# Altium PCB Board.PcbDoc
Units mil, origin at the board's own origin, x right, y up, seen from the top; angles counter-clockwise.
Board outline 1597.6 x 1597.6 mil, 2 copper layers (Top Layer, Bottom Layer), stack 80.925 mil thick; 28 components, 22 nets, 125 pads, 17 vias.
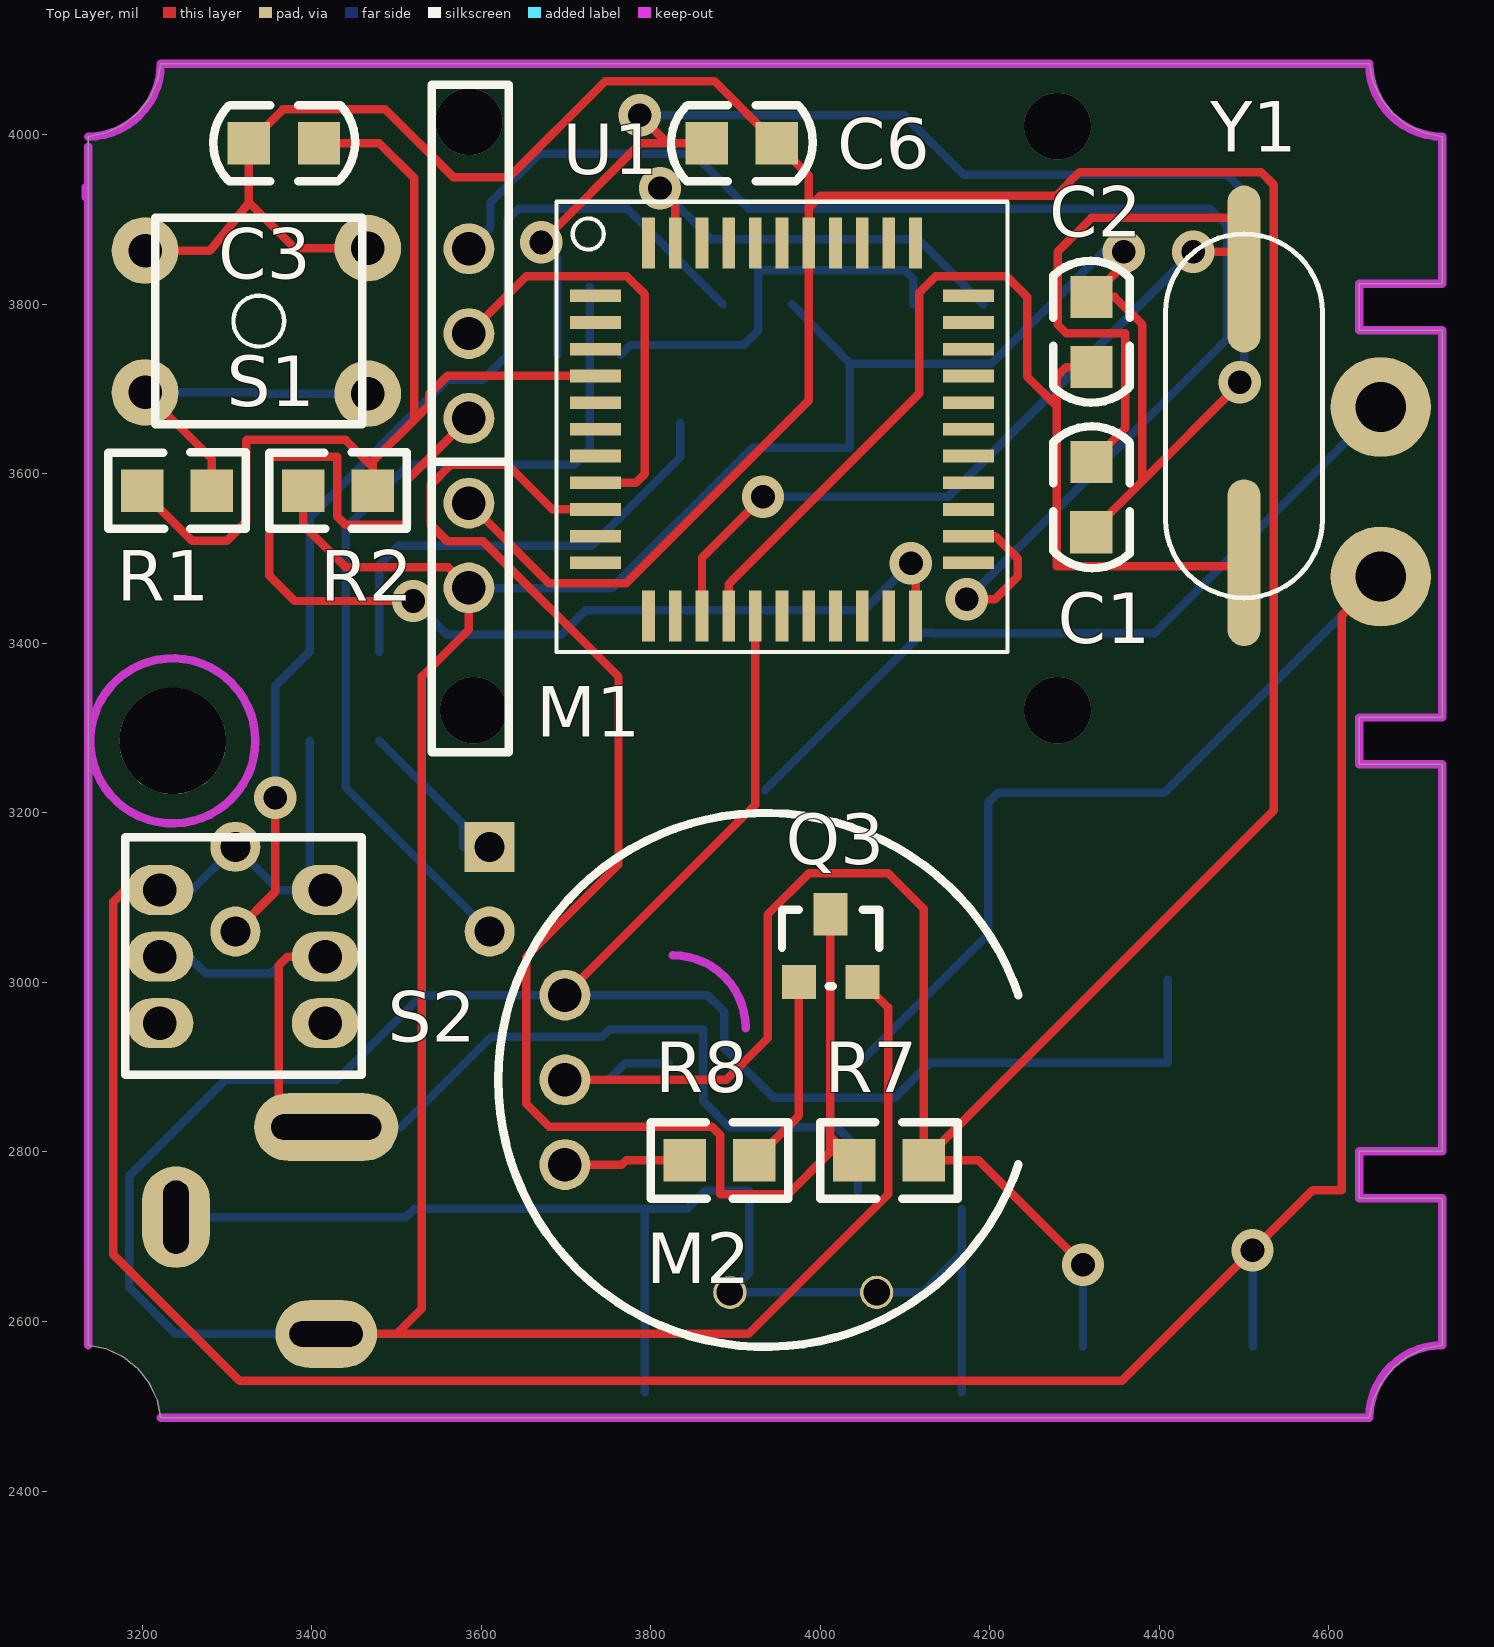
[diagram p0: Top Layer view]
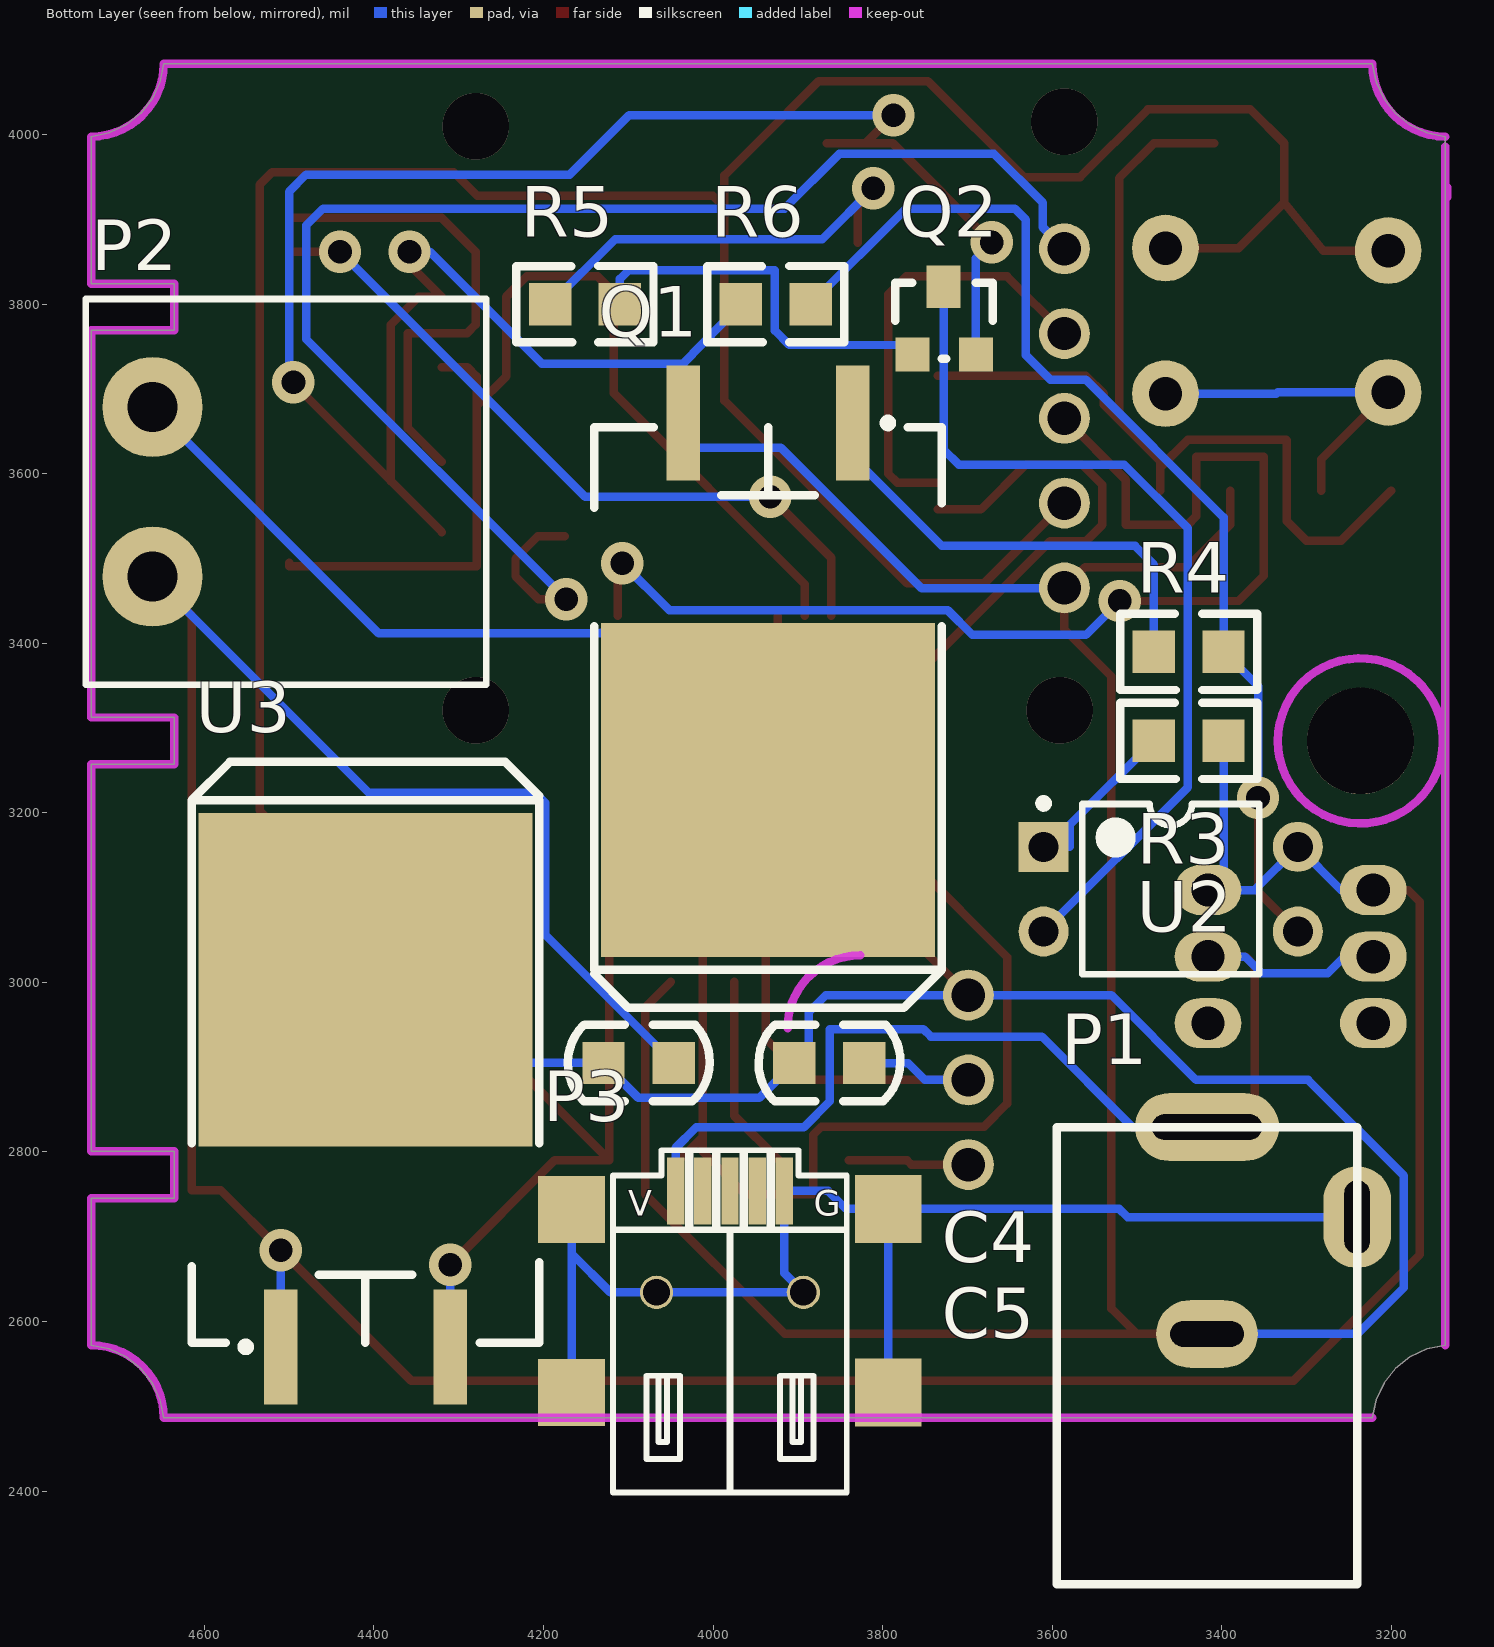
[diagram p1: Bottom Layer view, seen from below]
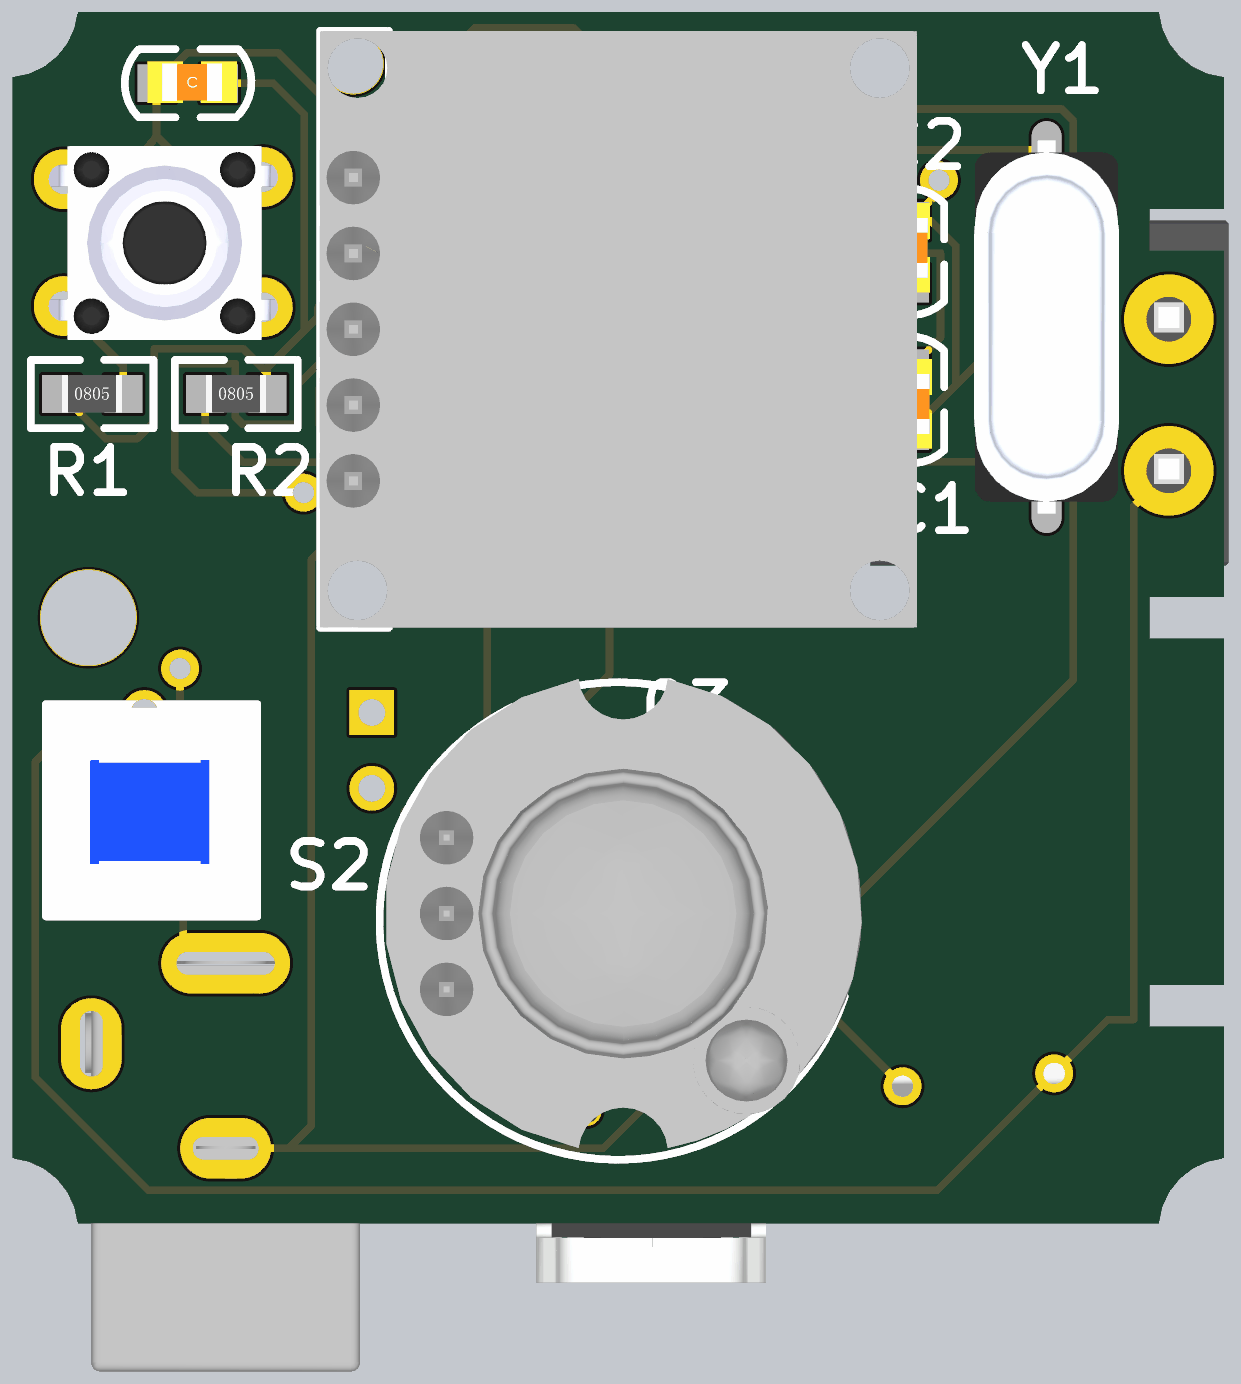
[diagram p2: 3D render of the assembled board from above, using the file's embedded part models]
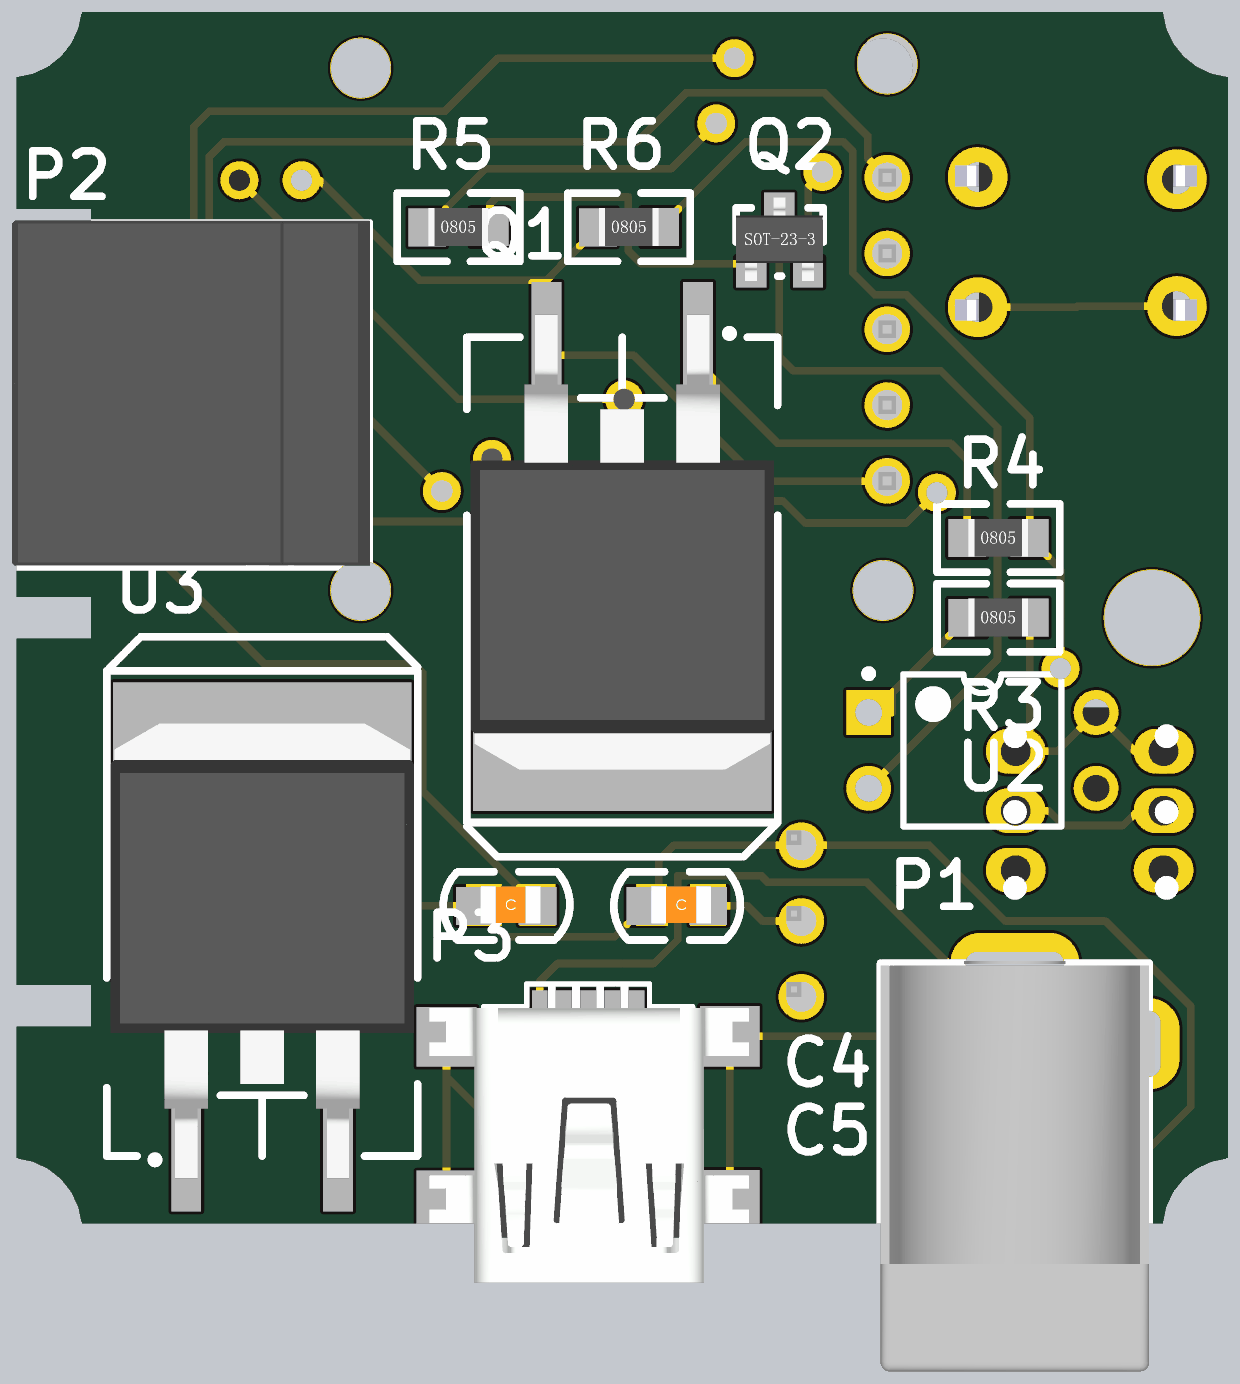
[diagram p3: 3D render of the assembled board from below, using the file's embedded part models]

## Layer stack, top to bottom
Top Solder: solder mask 0.4, Solder Resist, Dk 3.5
Top Layer: signal copper 1.4
Dielectric 1: dielectric 78.125, FR-4, Dk 4.8
Bottom Layer: signal copper 1.4
Bottom Solder: solder mask 0.4, Solder Resist, Dk 3.5

## Board outline
3136.2,3997.96 3136.2,2572.04 3157.67,2567.59 3177.53,2558.32 3194.73,2544.73 3208.32,2527.53 3217.59,2507.67 3222.04,2486.2 4647.96,2486.2 4652.41,2507.67 4661.68,2527.53 4675.27,2544.73 4692.47,2558.32 4712.33,2567.59 4733.8,2572.04 4733.8,2745.63 4635.79,2745.63 4635.79,2800.75 4733.8,2800.75 4733.8,3257.44 4635.79,3257.44 4635.79,3312.56 4733.8,3312.56 4733.8,3769.25 4635.79,3769.25 4635.79,3824.37 4733.8,3824.37 4733.8,3997.96 4712.33,4002.41 4692.47,4011.68 4675.27,4025.27 4661.68,4042.47 4652.41,4062.33 4647.96,4083.8 3222.04,4083.8 3217.59,4062.33 3208.32,4042.47 3194.73,4025.27 3177.53,4011.68 3157.67,4002.41

## Design rules (kind name [scope] priority, off if disabled: settings)
Clearance [All] p1: gap=10
PolygonConnect [All] p1: connectstyle=Relief reliefconductorwidth=10 reliefentries=4 polygonreliefangle="90 Angle" airgapwidth=10
RoomDefinition LED [InComponentClass('LED')] p1: confinementstyle=ConfineIn formatcopy=TRUE lockcomponents=FALSE outline 4080,3295 4747.44,3295 4747.44,3890 4080,3890
RoomDefinition Amplifier [InComponentClass('Amplifier')] p2: confinementstyle=ConfineIn formatcopy=TRUE lockcomponents=FALSE outline 3110,2920 4760,2920 4760,4130 3110,4130
RoomDefinition Power [InComponentClass('Power')] p3: confinementstyle=ConfineIn formatcopy=TRUE lockcomponents=FALSE outline 3160,2360 4680,2360 4680,3290 3160,3290
RoomDefinition Reset [InComponentClass('Reset')] p4: confinementstyle=ConfineIn formatcopy=TRUE lockcomponents=FALSE outline 3140,3430 3540,3430 3540,4060 3140,4060
RoomDefinition Oscillator [InComponentClass('Oscillator')] p5: confinementstyle=ConfineIn formatcopy=TRUE lockcomponents=FALSE outline 4170,3360 4830,3360 4830,4079.8 4170,4079.8
RoomDefinition Microcontroller_STC12C5A60S2 [InComponentClass('Microcontroller_STC12C5A60S2')] p6: confinementstyle=ConfineIn formatcopy=TRUE lockcomponents=FALSE outline 3680,3380 4260,3380 4260,4060 3680,4060
RoomDefinition Level_Switch [InComponentClass('Level_Switch')] p7: confinementstyle=ConfineIn formatcopy=TRUE lockcomponents=FALSE outline 3737.7,2739.8 4327.7,2739.8 4327.7,3220 3737.7,3220
RoomDefinition Human_Body_Detection [InComponentClass('Human_Body_Detection')] p8: confinementstyle=ConfineIn formatcopy=TRUE lockcomponents=FALSE outline 3600,2540 4330,2540 4330,3230 3600,3230
RoomDefinition Gesture_Recognition [InComponentClass('Gesture_Recognition')] p9: confinementstyle=ConfineIn formatcopy=TRUE lockcomponents=FALSE outline 3530.51,3260 4340.51,3260 4340.51,4170.51 3530.51,4170.51
RoutingVias [All] p1: holewidth=28 width=50 viastyle="Through Hole" minholewidth=28 minwidth=50 maxholewidth=28 maxwidth=50
SolderMaskExpansion [All] p1: expansion=4
Width [All] p1: maxlimit=10 minlimit=10 preferedwidth=10
29 further rules are at their usual default settings.

## Classes and differential pairs
component class Amplifier: Q1 Q2 R3 R4 R5 R6 U2
component class Gesture_Recognition: M1
component class Human_Body_Detection: M2
component class LED: P2
component class Level_Switch: Q3 R7 R8
component class Microcontroller_STC12C5A60S2: C6 U1
component class Oscillator: C1 C2 Y1
component class Power: C4 C5 P1 P3 S2 U3
component class Reset: C3 R1 R2 S1

## Components (designator, comment, footprint, x,y, rotation, side; value= is the part's Value field where it differs from the comment)
C1 "Cap" C0805 4320,3620 r270 top
C2 "Cap" C0805 4320,3720 r90 top
C3 "Cap" C0805 3320,3990 r0 top
C4 "Cap" C0805 3910.22,2905 r180 bottom
C5 "Cap" C0805 4135.22,2905 r180 bottom
C6 "Cap" C0805 3860,3990 r0 top
M1 "PAJ7620U2" PAJ7620U2_INTERFACE 3935.51,3665.51 r0 top
M2 "Human_Sensor" PM-6 3935,2885 r0 top
P1 "Power_Connect" DC_005 3240,2290 r0 bottom
P2 "Header 2" CCM-5.08-2P 4740,3351.26 r90 bottom
P3 "USB" USB-MINI 3980,2590 r180 bottom
Q1 "MOSFET-N" TO-263 3935,3660 r0 bottom
Q2 "NPN" SOT-23 3769.76,3740 r180 bottom
Q3 "NPN" SOT-23 3970,3000 r0 top
R1 "Res1" R0805 3200,3580 r0 top
R2 "Res1" R0805 3390,3580 r0 top
R3 "Res1" R0805 3480,3285 r180 bottom
R4 "Res1" R0805 3480,3390 r180 bottom
R5 "Res1" R0805 4192.2,3800 r180 bottom
R6 "Res1" R0805 3967.2,3800 r180 bottom
R7 "Res1" R0805 4040,2790 r0 top
R8 "Res1" R0805 3840,2790 r0 top
S1 "SW-PB" KEY-DIP4 3336.3,3780.1 r0 top
S2 "SW-PB" SW7X7 3180,3170 r0 top
U1 "STC12C5A60S2_44PIN" STC12C5A60S2_44PIN 3735,3810 r0 top
U2 "PC817" DIP-4 3460,3110 r180 bottom
U3 "LM7805" TO-263 4410,2570 r180 bottom
Y1 "XTAL" XTAL-HC49S-SMD 4500,3570 r90 top

## Footprints (in the part's own frame and the unit in brackets; to place one, negate y for a bottom-side part, rotate by r counter-clockwise, add the part's x,y. Pads: shape width x height; smd on the part's side, far side on the other; paste and mask are expansions set on the pad)
C0805 [mil]
  rect 50x50 smd: 1(6,0) 2(88.7,-0.1)
  silkscreen extent -36,-45 131,45, body extent -6,-26 112,29, height 37
CCM-5.08-2P [mm]
  round 3 hole 1.5: 1(3.24,-2) 2(8.32,-2)
  silkscreen extent 0,-12 11.56,0, body extent 0.06,-12 11.62,0, height 8.5
DC_005 [mil]
  oval 170x80 hole 30 slot 129.92 at 0 deg: 1(177.17,-539.37)
  oval 80x120 hole 30 slot 86.61 at 90 deg: 2(0,-433.07)
  oval 120x80 hole 30 slot 86.61 at 0 deg: 3(177.17,-295.28)
  silkscreen extent 0,-539 354,0, body extent -8,-542 354,-1, height 434
DIP-4 [mm] "DIP; 4 Leads; Row Spacing 7.62 mm; Pitch 2.54 mm"
  rect 1.5x1.5 hole 0.9: 1(-3.81,1.27)
  round 1.5 hole 0.9: 2(-3.81,-1.27) 3(3.81,-1.27) 4(3.81,1.27)
  silkscreen extent -3.94,-2.55 2.65,2.69, body extent -3.15,-2.5 3.15,2.5, height 5.6
KEY-DIP4 [mm] "6X6"
  round 2 hole 1: 1(-3.373,2.116) 1(3.299,2.189) 2(-3.373,-2.134) 2(3.299,-2.172)
  silkscreen extent -3.06,-3.09 3.13,3.1, body extent -4.12,-3.27 4.14,3.23, height 4.3
PAJ7620U2_INTERFACE [mil]
  round 60 hole 39.37: 1(-350,-200) 2(-350,-100) 3(-350,0) 4(-350,100) 5(-350,200)
  silkscreen extent -394,-394 -303,394, body extent -394,-394 394,394, height 210
PM-6 [mil] "Human_Sensor"
  round 60 hole 39.37: 1(-236.22,-100) 2(-236.22,0) 3(-236.22,100)
  silkscreen extent -315,-315 299,315, body extent -306,-300 321,319, height 460
R0805 [mil] "1/8W"
  rect 50x50 smd: 1(0,0) 2(82.3,0.2)
  silkscreen extent -40,-45 122,45, body extent 1,-24 80,25, height 22
SOT-23 [mil]
  rect 40x40 smd: 1(4.88,0.63) 2(79.88,0.63)
  rect 40x50 smd: 3(41.88,80.63)
  silkscreen extent -15,-4 100,86, body extent -15,-11 99,99, height 47
STC12C5A60S2_44PIN [mil]
  rect 60x15 smd: 1(-0.01,-0.03) 2(-0.01,-31.53) 3(-0.01,-63.02) 4(-0.01,-94.52) 5(-0.01,-126.02) 6(-0.01,-157.51) 7(-0.01,-189.01) 8(-0.01,-220.5) 9(-0.01,-252) 10(-0.01,-283.5) 11(-0.01,-314.99) 23(439.99,-314.99) 24(439.99,-283.5) 25(439.99,-252) 26(439.99,-220.5) 27(439.99,-189.01) 28(439.99,-157.51) 29(439.99,-126.02) 30(439.99,-94.52) 31(439.99,-63.02) 32(439.99,-31.53) 33(439.99,-0.03)
  rect 15x60 smd: 12(62.51,-377.51) 13(94.01,-377.51) 14(125.5,-377.51) 15(157,-377.51) 16(188.5,-377.51) 17(219.99,-377.51) 18(251.49,-377.51) 19(282.98,-377.51) 20(314.48,-377.51) 21(345.98,-377.51) 22(377.47,-377.51) 34(377.47,62.49) 35(345.98,62.49) 36(314.48,62.49) 37(282.98,62.49) 38(251.49,62.49) 39(219.99,62.49) 40(188.5,62.49) 41(157,62.49) 42(125.5,62.49) 43(94.01,62.49) 44(62.51,62.49)
  silkscreen extent -46,-420 486,111, body extent -16,-396 456,76, height 41
SW7X7 [mm]
  oval 2x1.5 hole 1: 1(1.041,-1.549) 1(5.994,-1.549) 2(1.041,-3.543) 2(5.994,-3.543) 3(1.041,-5.537) 3(5.994,-5.537)
  silkscreen extent 0,-7.09 7.09,0.03, body extent -0.02,-7.09 6.98,-0.09, height 13
TO-263 [mm]
  rect 1x3.45 smd: 1(-2.54,0) 3(2.54,0)
  rect 10x10 smd: 2(0,11)
  silkscreen extent -5.21,-0.12 5.21,17.53, body extent -5.08,-0.65 5.08,14.61, height 4.88
USB-MINI [mm]
  rect 2x2 smd: 0(-4.746,-1.872) 0(-4.746,3.612)
  round 1 hole 0.8: 0(-2.2,1.128) 0(2.2,1.128)
  rect 2x2.032 smd: 0(4.746,-1.872) 0(4.746,3.628)
  rect 0.52x2 smd: 1(-1.626,4.166) 2(-0.813,4.166) 3(0,4.166) 4(0.813,4.166) 5(1.626,4.166)
  silkscreen extent -3.5,-4.87 3.5,5.38, body extent -5.32,-4.63 5.38,4.57, height 3.95
XTAL-HC49S-SMD [mm]
  oval 5x1 smd: 1(-1.9,0) 2(6.9,0)
  silkscreen extent -2.95,-2.35 7.95,2.35, body extent -3.75,-2.4 8.75,2.4, height 4.02

## Part data
C1 C2 C3 C4 C5 C6: "Non-Polar Capacitor"
M1: library part PAJ7620U2_Interface
P1: library part Power
P2: "Header, 2-Pin"
P3: library part USBPort
Q1: "N-Channel MOSFET"
Q2 Q3: "NPN Bipolar Transistor"
R1 R2 R3 R4 R5 R6 R7 R8: "Resistor"
S1 S2: "Switch"
U1: "MCU"
U2: library part Optoisolator1, "4-Pin Phototransistor Optocoupler"
Y1: library part XTAL_1, "Crystal Oscillator"

## Free pads (board coordinates)
  round 125.98 hole 125.98: 1(3236.18,3285)

## Via types
v1: diameter 50, hole 28, Top Layer to Bottom Layer, 13 vias
v2: diameter 78.74, hole 78.74, Top Layer to Bottom Layer, 4 vias

## Nets (pads, with @x,y where several pads share a name; then routed paths per layer and width w, separated by ;. In a path a pad name is that pad's centre, name@x,y a point inside that pad or via, vN(x,y) a via of type N, cw(c..) or ccw(c..) an arc to the next point about the centre after c; other vN are vias at no path point)
GND: C1.2 C2.2 C4.1 C5.1 C6.1 M1.1 M2.3 P1.3 Q1.3 Q2.2 Q3.2 R2.1 R6.1 U1.16 U3.2 | length 7683.7
  Top Layer w10: R2.1 3390,3540 3440,3490 3561.02,3490 M1.1 3585.51,3416.54 3530,3361.03 3530,2615.28 3500,2585.28 ; P1.3 3500,2585.28 ; v1(3671,3873) 3788,3990 3820,3990 ; M2.3 3923.5,3209.72 U1.16 ; v1(3787,4023) 3820,3990 ; C6.1 3820,3990 ; Q3.2 4080,2970.51 4080,2750 3915.28,2585.28 3500,2585.28 ; C1.2 4380,3591.4 ; v1(4358,3862) 4358,3846.6 C2.2 4347.3,3808.7 4380,3776 4380,3591.4 ; v1(4495,3708) 4495,3706.4 4380,3591.4
  Bottom Layer w10: P1.3 3239.72,2585.28 3185,2640 3185,2772 3298,2885 3430,2885 3530,2985 M2.3 3866.75,2985 3886.85,2964.9 3886.85,2922.37 C4.1 3945.22,2864 4088.22,2864 C5.1 4410,2905 U3.2 ; M1.1 3585.51,3465 3754,3465 3920,3631 4035,3631 Q1.3 4035,3730 ; v1(3671,3873) 3689.88,3854.12 Q2.2 ; v1(3787,4023) 4099,4023 4169,3953 4480,3953 4500,3933 4500,3713 v1(4495,3708) ; R6.1 4035,3730 ; v1(4358,3862) 4334,3862 4202,3730 4035,3730
INT0: M1.4 U1.8 | length 518.5
  Top Layer w10: M1.4 3653,3833 3772,3833 3793,3812 3793,3600 3782.5,3589.5 U1.8
INT1: Q3.3 R7.1 U1.9 | length 1903.3
  Top Layer w10: U1.9 3684,3558 3631,3611 3564.51,3611 3540.51,3587.01 3540.51,3540 3560,3520.51 3602.23,3520.51 3762,3360.74 3762,3139 3653,3030 3653,2857 3680,2830 3872,2830 3882,2820 3882,2750 3961.88,2750 4011.88,2800 4011.88,2818.12 ; Q3.3 4011.88,2818.12 ; R7.1 4011.88,2818.12
NetM2_1: M2.1 R8.1 | length 143.3
  Top Layer w10: M2.1 3766,2785 3771,2790 R8.1
NetP1_2: P1.2 P3.0 P3.5 | length 1542.5
  Bottom Layer w10: P1.2 3511,2723.07 3520.77,2732.84 P3.0@3793.15,2732.84 ; P3.0@3793.15,2516.3 P3.0@3793.15,2732.84 ; P3.0@4166.85,2516.3 4166.85,2680 ; P3.0@4166.85,2732.21 4166.85,2680 ; P3.0@3793.15,2732.84 3843,2732.84 3864.16,2754 P3.5 3916,2657.03 3893.39,2634.41 4066.61,2634.41 4121.26,2634.41 4166.85,2680
NetQ1_1: Q1.1 R4.1 | length 550.6
  Bottom Layer w10: R4.1 3480,3493 3502,3515 3730,3515 3835,3620 Q1.1
NetQ2_1: Q2.3 U2.2 | length 1064.5
  Bottom Layer w10: U2.2 3440,3230 3440,3536 3515,3611 3710,3611 3727.88,3628.88 Q2.3
NetQ2_2: Q2.1 R5.2 | length 461.7
  Bottom Layer w10: Q2.1 3776.25,3752 3910,3752 3927,3769 3927,3840 4099.9,3840 4109.9,3830 R5.2
NetQ3_2: Q3.1 R8.2 | length 232.2
  Top Layer w10: R8.2 3974.88,2842.78 Q3.1
NetR1_2: R1.2 S1.2 | length 411.9
  Top Layer w10: S1.2@3203.5,3696.1 3282.3,3617.3 R1.2
  Bottom Layer w10: S1.2@3203.5,3696.1 3334,3696.1 3335.5,3694.6 S1.2@3466.2,3694.6
NetR3_1: R3.1 U2.1 | length 197.1
  Bottom Layer w10: R3.1 3578.87,3186.13 3578.87,3160 U2.1
NetR4_2: R4.2 R6.2 U2.3 | length 1303.6
  Top Layer w10: U2.3 3357,3107 v1(3357,3218)
  Bottom Layer w10: v1(3357,3218) 3357,3349.5 R4.2 3397.7,3548.7 3560,3711 3602,3711 3631,3740 3631,3900 3644,3913 3772.1,3913 R6.2
PWM: R5.1 U1.43 | length 509.9
  Top Layer w10: v1(3811,3937) 3829.01,3918.99 U1.43
  Bottom Layer w10: v1(3811,3937) 3871,3877 4115.2,3877 R5.1
PWM_GND: P2.2 Q1.2 | length 913.9
  Bottom Layer w10: Q1.2 4120.58,3412.51 4132.49,3412.51 4133,3412 4394.44,3412 P2.2
PWM_VCC: C5.2 P2.1 R3.2 S2.1 U2.4 U3.1 | length 4294.8
  Top Layer w10: S2.1@3221,3109 3180,3109 3166,3095 3166,2679 3315,2530 4356,2530 v1(4510,2684) 4581,2755 4615,2755 4615,3432.56 P2.1
  Bottom Layer w10: S2.1@3221,3109 3259,3109 U2.4 3361,3109 S2.1@3397.7,3109 ; R3.2 S2.1@3397.7,3109 ; S2.1@3416,3109 S2.1@3397.7,3109 ; C5.2 4198,3056.38 4198,3212 4210,3224 4406.44,3224 P2.1 ; U3.1 v1(4510,2684)
RST: C3.2 R1.1 R2.2 U1.4 | length 1176.4
  Top Layer w10: R1.1 3259,3521 3300,3521 3323,3544 3323,3639.51 3323.49,3640 3440,3640 3472.3,3607.7 ; C3.2 3480,3989.9 3521,3948.9 3521,3663.73 ; R2.2 3472.3,3607.7 ; U1.4 3560,3715.48 3539,3694.48 3539,3681.73 3521,3663.73 ; 3472.3,3607.7 3472.3,3615.03 3521,3663.73
SCL: M1.5 U1.24 | length 1722.2
  Top Layer w10: v1(4173,3452) 4206,3452 4233,3479 4233,3500 4206.5,3526.5 U1.24
  Bottom Layer w10: M1.5 3611,3891 3611,3920 3668.49,3977.49 3851.02,3977.49 3915.51,3913 4460,3913 4480,3893 4480,3759 v1(4173,3452)
SDA: M1.3 U1.22 | length 1418
  Top Layer w10: v1(3520,3450) 3380,3450 3350,3480 3350,3620 3430,3620 3430,3550 3440,3540 3513,3540 3513,3593 M1.3 ; v1(4107,3494.53) 4112.47,3489.06 U1.22
  Bottom Layer w10: v1(3520,3450) 3560,3410 3694,3410 3723,3439 4051.47,3439 v1(4107,3494.53)
VBAT: C3.1 C4.2 C6.2 M1.2 M2.2 R7.2 S1.1 U1.38 U3.3 | length 5264.7
  Top Layer w10: S1.1@3203.5,3863.4 3280,3863.4 3326,3920 ; S1.1@3466.2,3866.3 3379.7,3866.3 3326,3920 ; M1.2 3680.02,3471 3770.99,3471 3986.49,3686.5 U1.38 3986.49,3914.49 ; M2.2 3889,2885 3938,2934 3938,3080 3987,3129 4080,3129 4122.3,3086.7 R7.2 ; v1(4310,2667) 4186.8,2790.2 R7.2 ; 3326,3920 C3.1 3366,4030 3487,4030 3567,3950 3633.2,3950 3746.62,4063.43 3875.17,4063.43 C6.2 3986.49,3952.11 3986.49,3914.49 ; 3986.49,3914.49 4000,3928 4278,3928 4306,3956 4520,3956 4535,3941 4535,3202.9 R7.2
  Bottom Layer w10: M2.2 3750,2885 3769.9,2904.9 C4.2 ; U3.3 v1(4310,2667)
VIN: P1.1 P3.1 S2.2 | length 1350.7
  Top Layer w10: S2.2@3416,3030.5 3371.5,3030.5 3361,3020 3361,2829.37 P1.1
  Bottom Layer w10: S2.2@3221,3030.5 3255,3030.5 3274.5,3011 3353,3011 3372.5,3030.5 S2.2@3416,3030.5 ; P1.1 3505.37,2829.37 3612,2936 3743,2936 3751.9,2944.9 3862,2944.9 3862,2860 3893,2829 4020,2829 4044,2805 P3.1
XTAL1: C2.1 U1.15 Y1.1 | length 1257.8
  Top Layer w10: U1.15 3892,3470 4117,3695 4117,3814 4136,3833 4220,3833 4244,3809 4244,3715 4279,3680 ; C2.1 4290,3726 4279,3715 4279,3680 ; Y1.1 4500,3491 4279,3491 4279,3680
XTAL2: C1.1 U1.14 Y1.2 | length 1493.2
  Top Layer w10: U1.14 3860.5,3501 v1(3932.5,3573) ; C1.1 4360,3654 4360,3766 4290,3766 4280,3776 4280,3862 4320,3902 4500,3902 Y1.2@4500,3862 ; v1(4440,3862) Y1.2@4500,3862 ; Y1.2 Y1.2@4500,3862
  Bottom Layer w10: v1(3932.5,3573) 4151,3573 v1(4440,3862)
pads on no net: P3.2 P3.3 P3.4 S2.3 U1.1 U1.2 U1.3 U1.5 U1.6 U1.7 U1.10 U1.11 U1.12 U1.13 U1.17 U1.18 U1.19 U1.20 U1.21 U1.23 U1.25 U1.26 U1.27 U1.28 U1.29 U1.30 U1.31 U1.32 U1.33 U1.34 U1.35 U1.36 U1.37 U1.39 U1.40 U1.41 U1.42 U1.44
copper on no net:
  other v2: 3591.02,3321.02 4280,3321.02 4280,4010 3585.51,4015.51

## Keep-outs
Keep-Out Layer:
  circle w10: c3236.18,3285 r97.41
  lines w10: 3133.5,3926.3 3133.5,3938.06 ; 3136.2,2572.04 3136.2,3986.2 ; 3136.2,3997.96 ccw(c3136.2,4083.8) 3222.04,4083.8 4647.96,4083.8 ccw(c4733.8,4083.8) 4733.8,3997.96 4733.8,3824.37 4635.79,3824.37 4635.79,3769.25 4733.8,3769.25 4733.8,3312.56 4635.79,3312.56 ; 3222.04,2486.2 4647.96,2486.2 cw(c4733.8,2486.2) 4733.8,2572.04 4733.8,2745.63 4635.79,2745.63 4635.79,2800.75 4733.8,2800.75 4733.8,3257.44 4635.79,3257.44 4635.79,3312.56 ; 3826.2,3032.04 cw(c3826.2,2946.2) 3912.04,2946.2 ; 4635.79,3312.56 4635.79,3312.56

## Text inside footprints (layer, text, board x,y; h text height)
P3: Bottom Overlay "V" at 4100,2725 h30; Bottom Overlay "G" at 3881,2725 h30